# Altium PCB PCB1.PcbDoc (part 1 of 3)
Units mm, origin at the board's own origin, x right, y up, seen from the top; angles counter-clockwise.
Board outline 40 x 42 mm, 4 copper layers (Top Layer, GND, VCC, Bottom Layer), stack 4.941 mm thick; 42 components, 33 nets, 156 pads, 53 vias.
Unrouted connection lines stored in the file: 1.
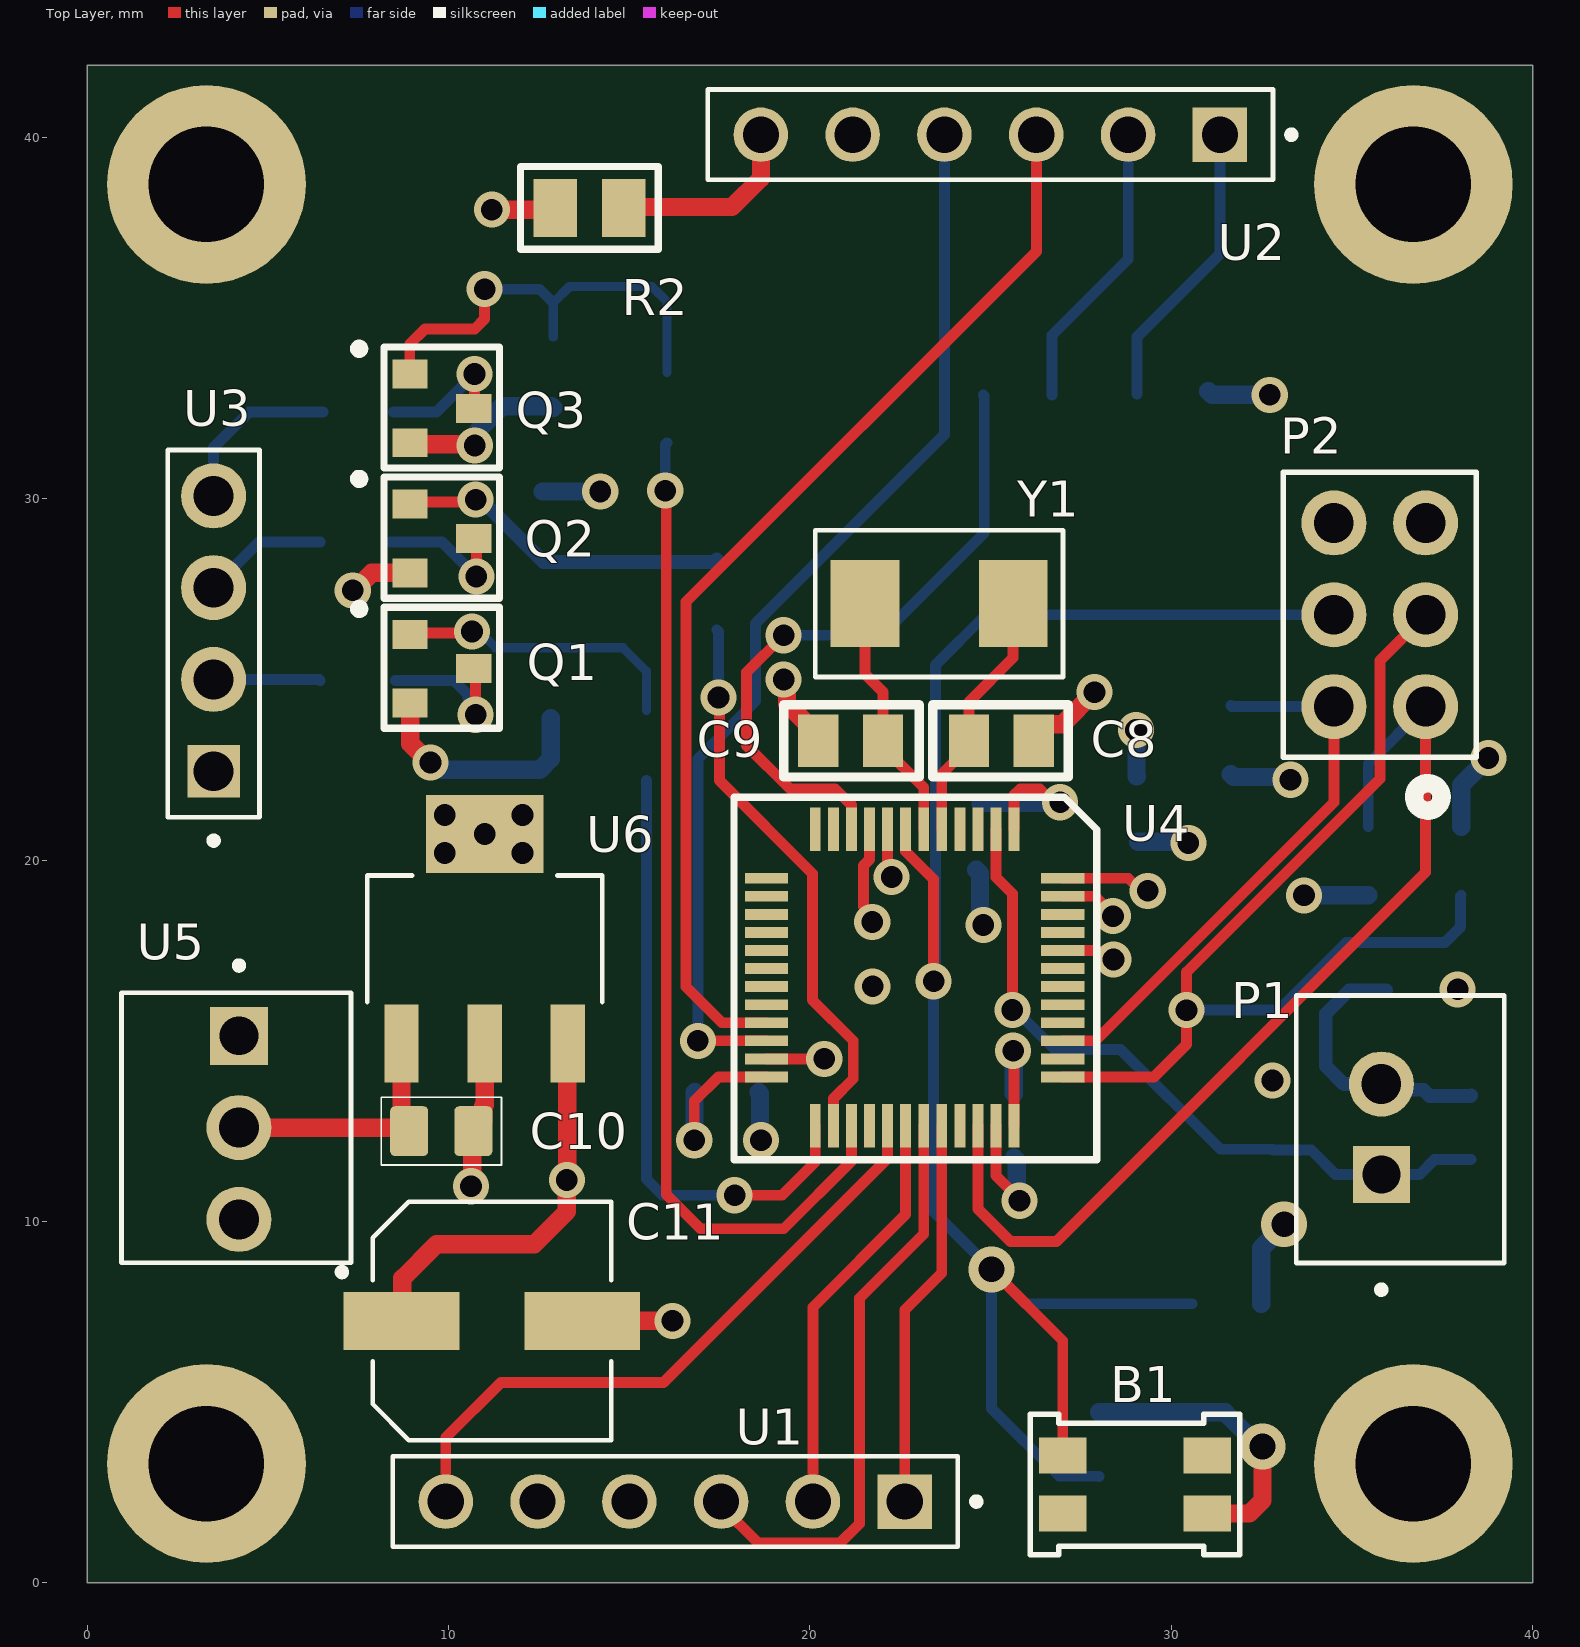
[diagram p0: Top Layer view]
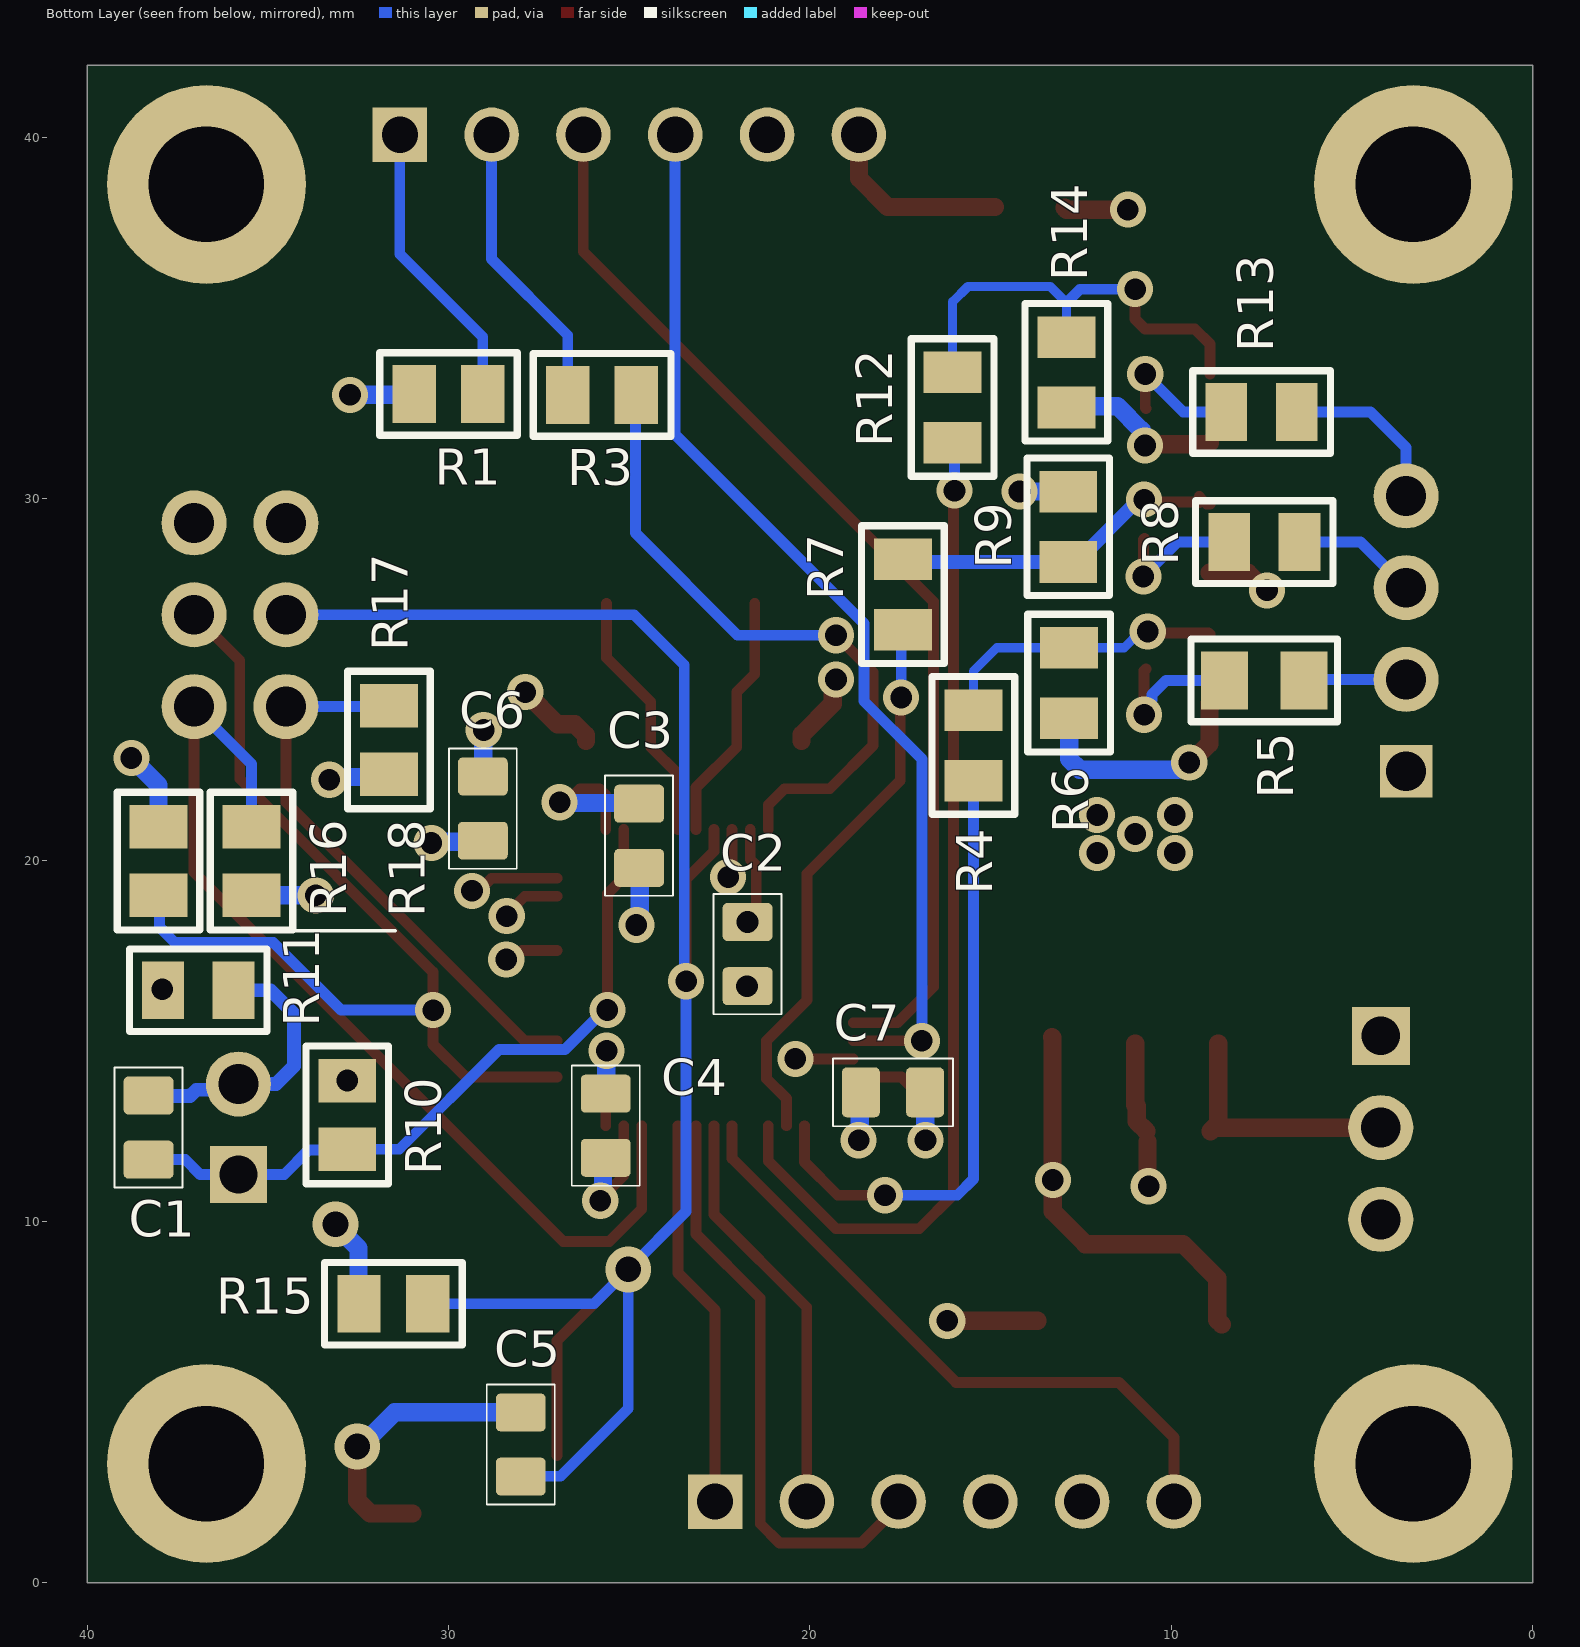
[diagram p1: Bottom Layer view, seen from below]
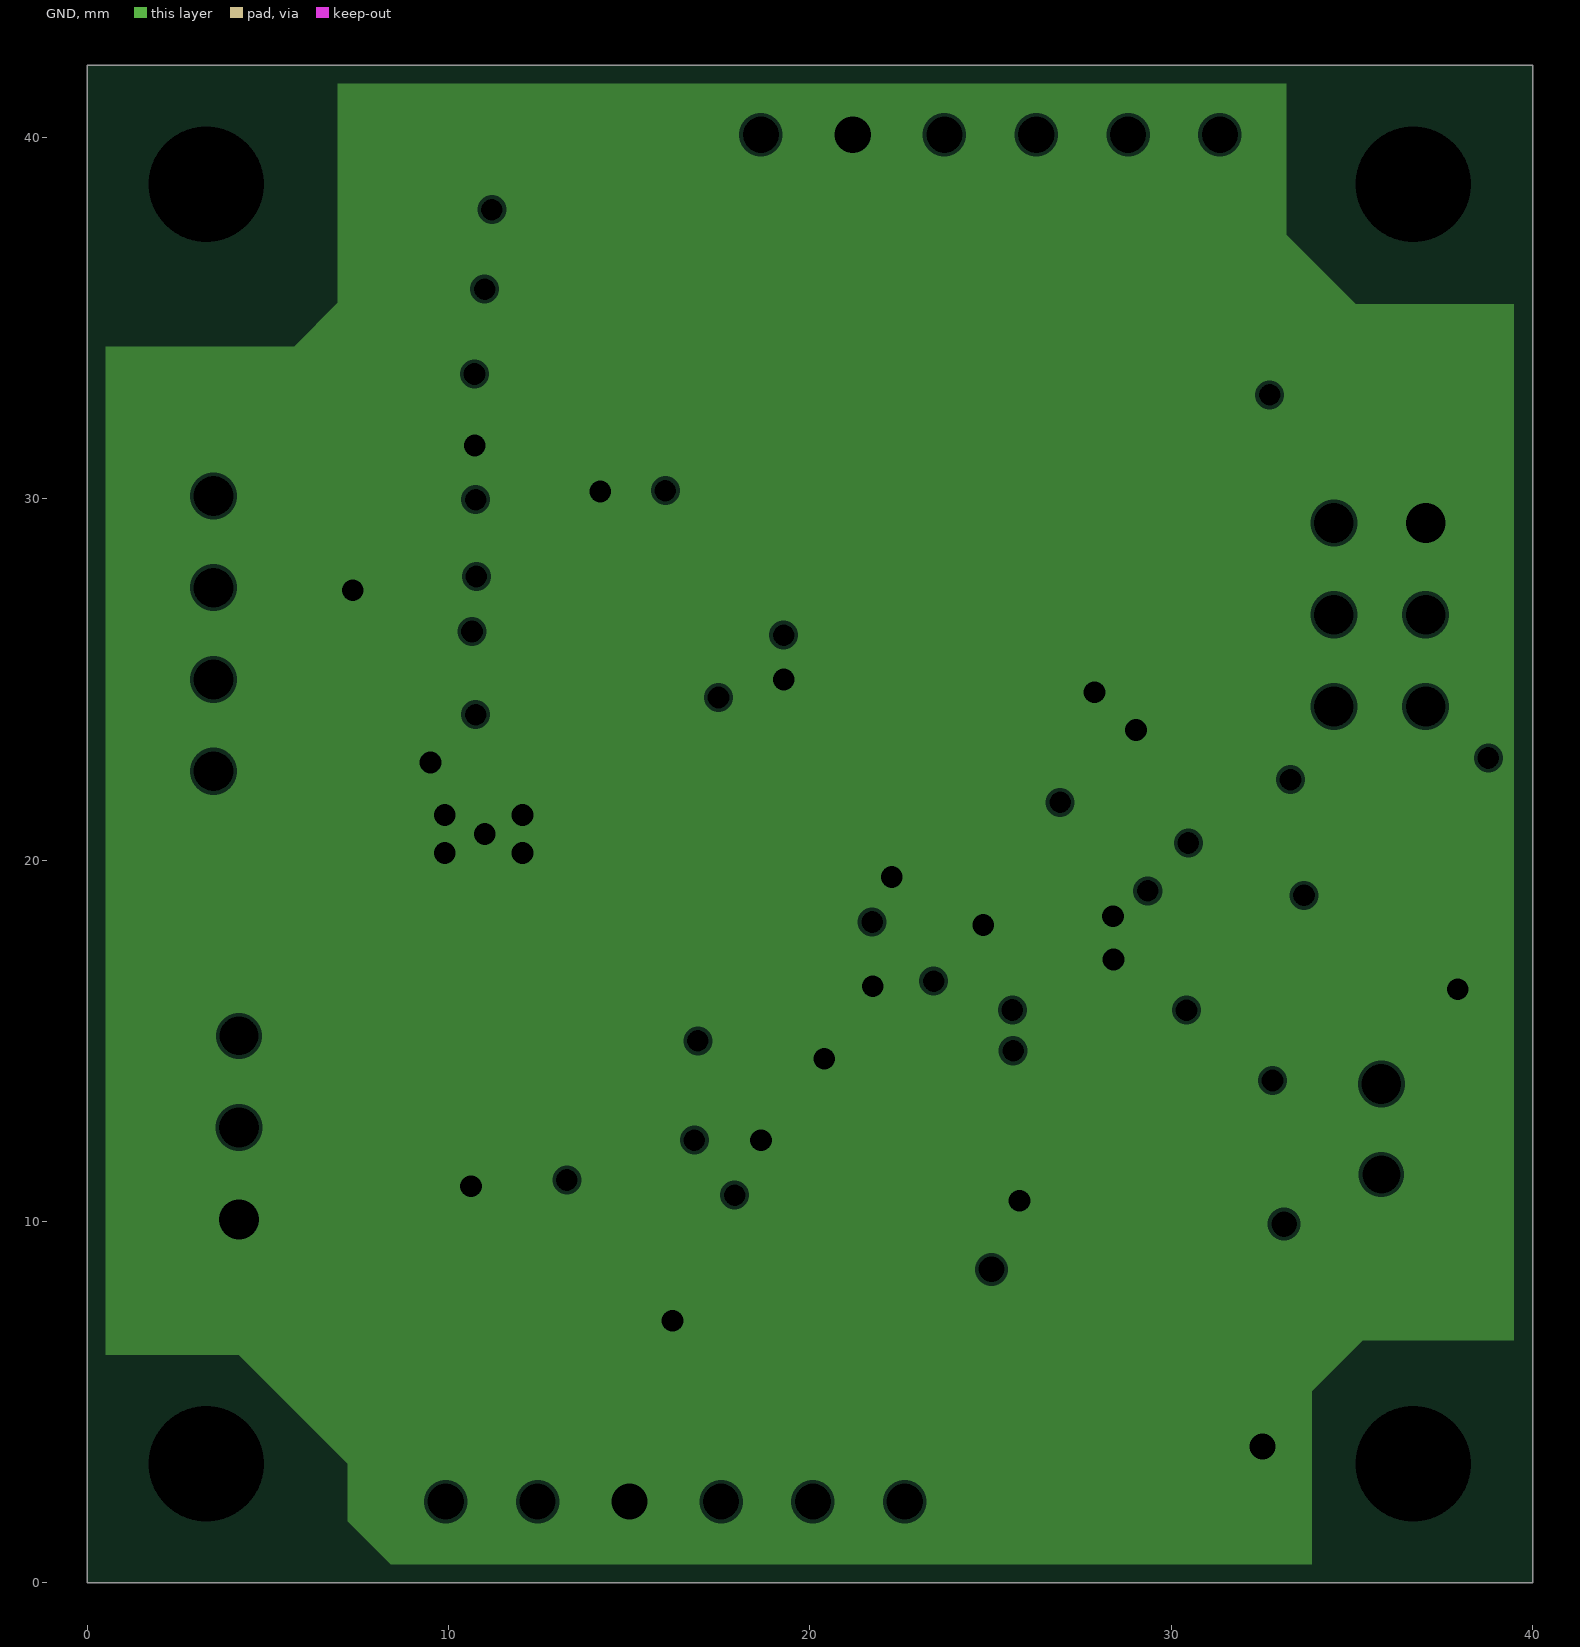
[diagram p2: GND, clearances drawn from the general rule]
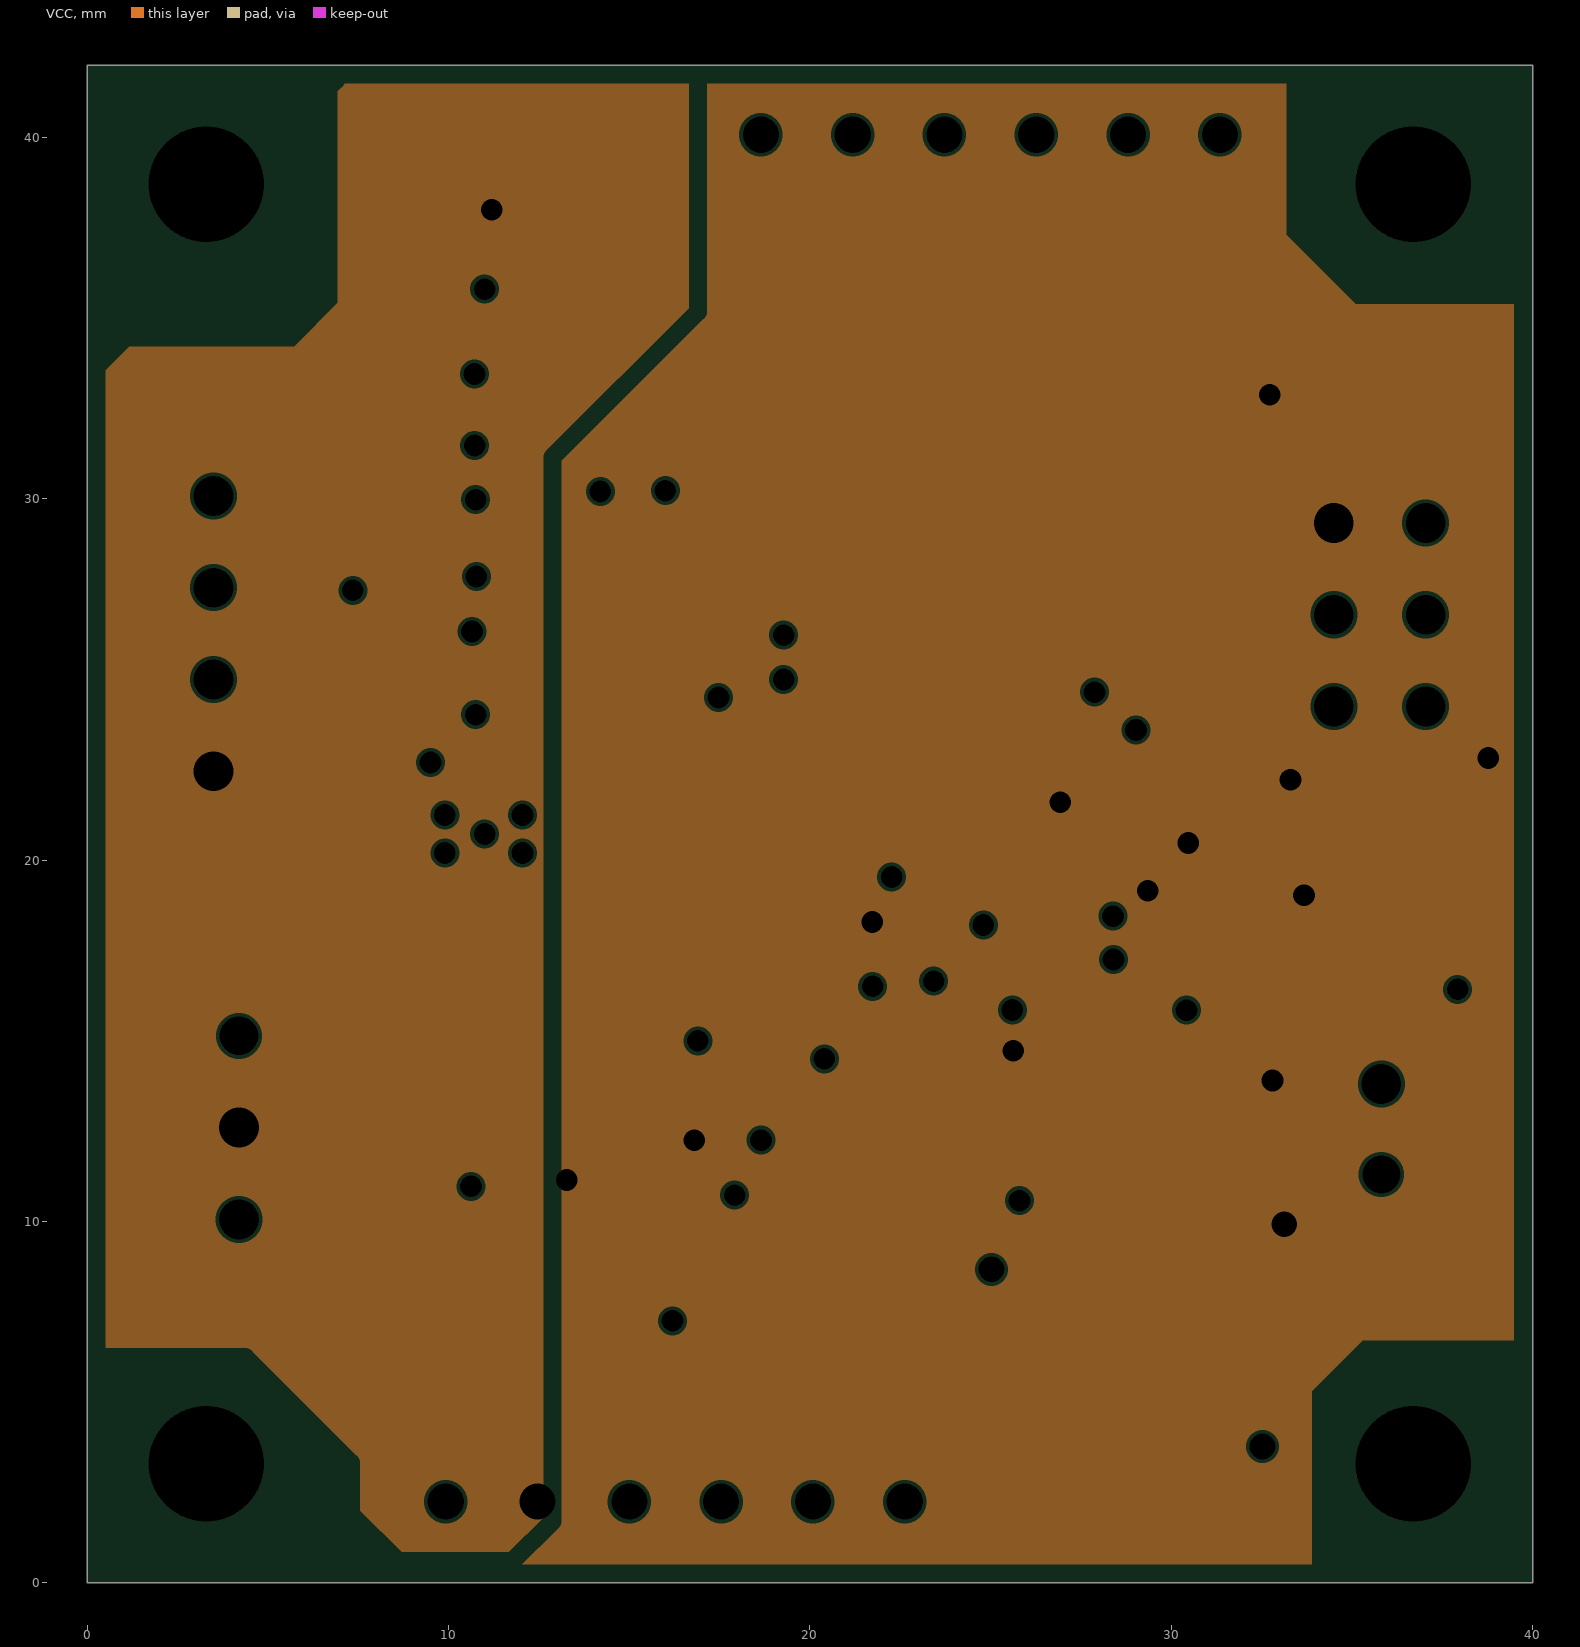
[diagram p3: VCC, clearances drawn from the general rule]
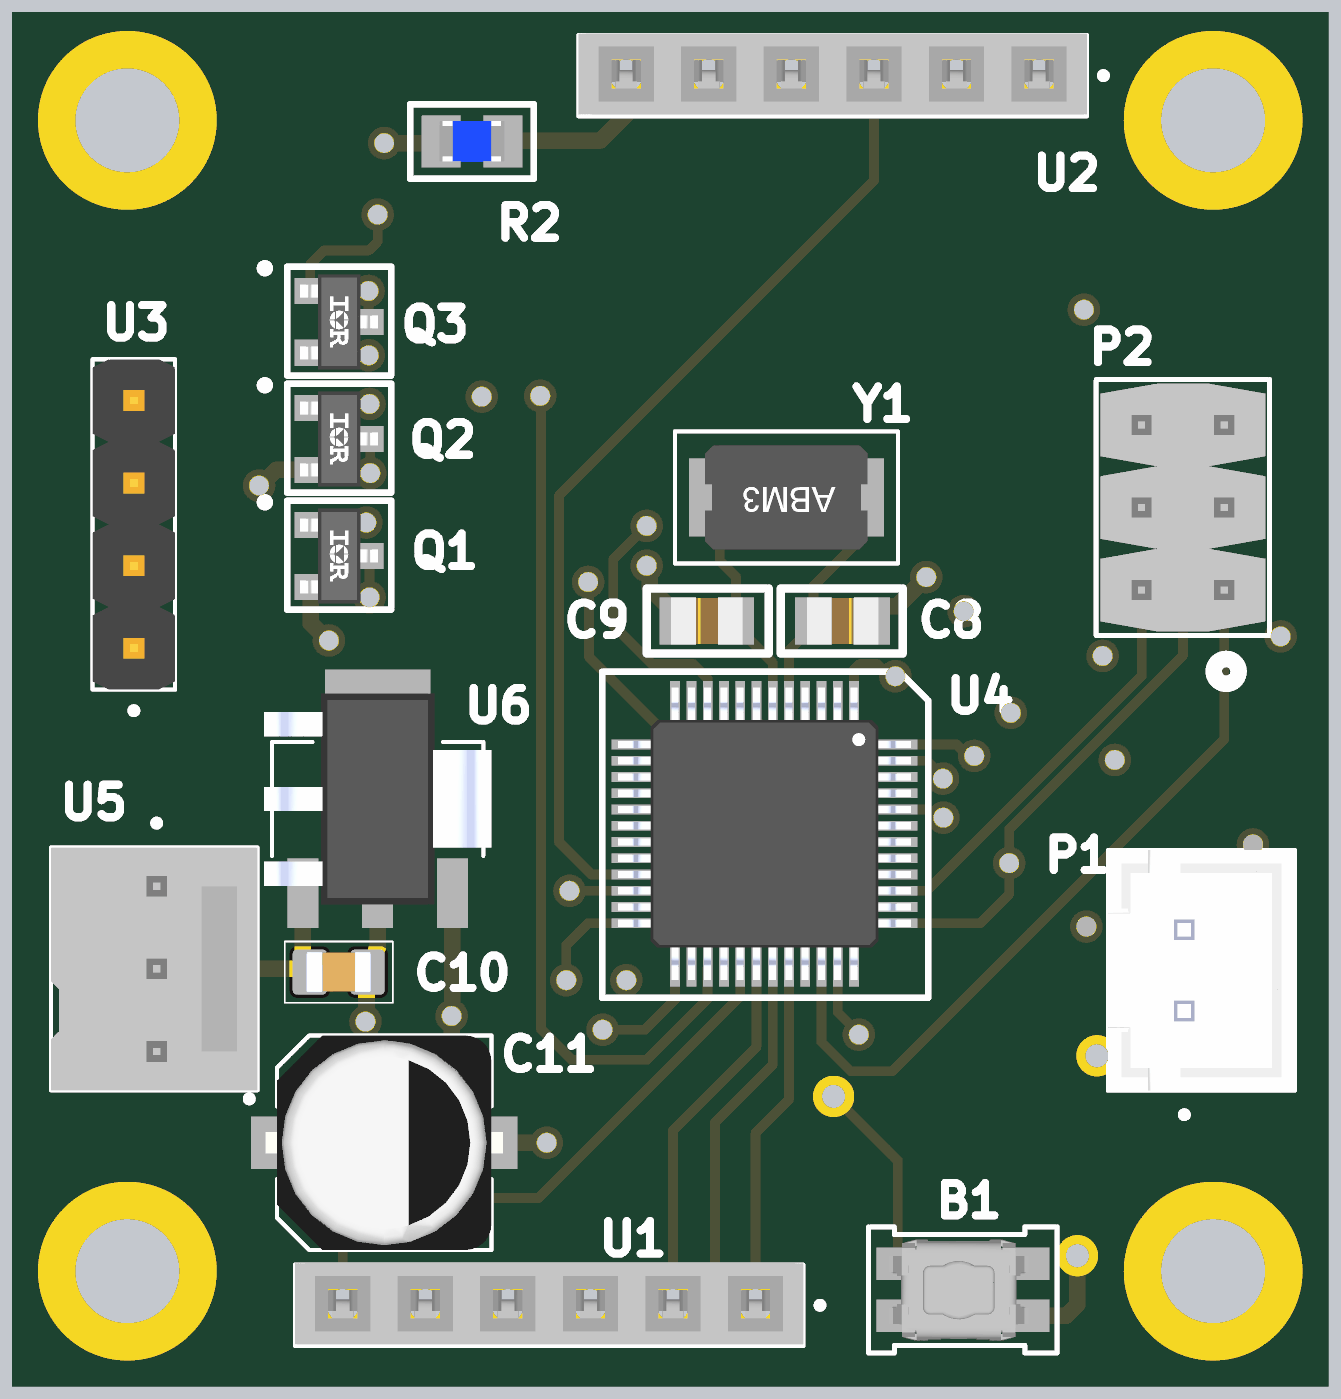
[diagram p4: 3D render of the assembled board from above, using the file's embedded part models]
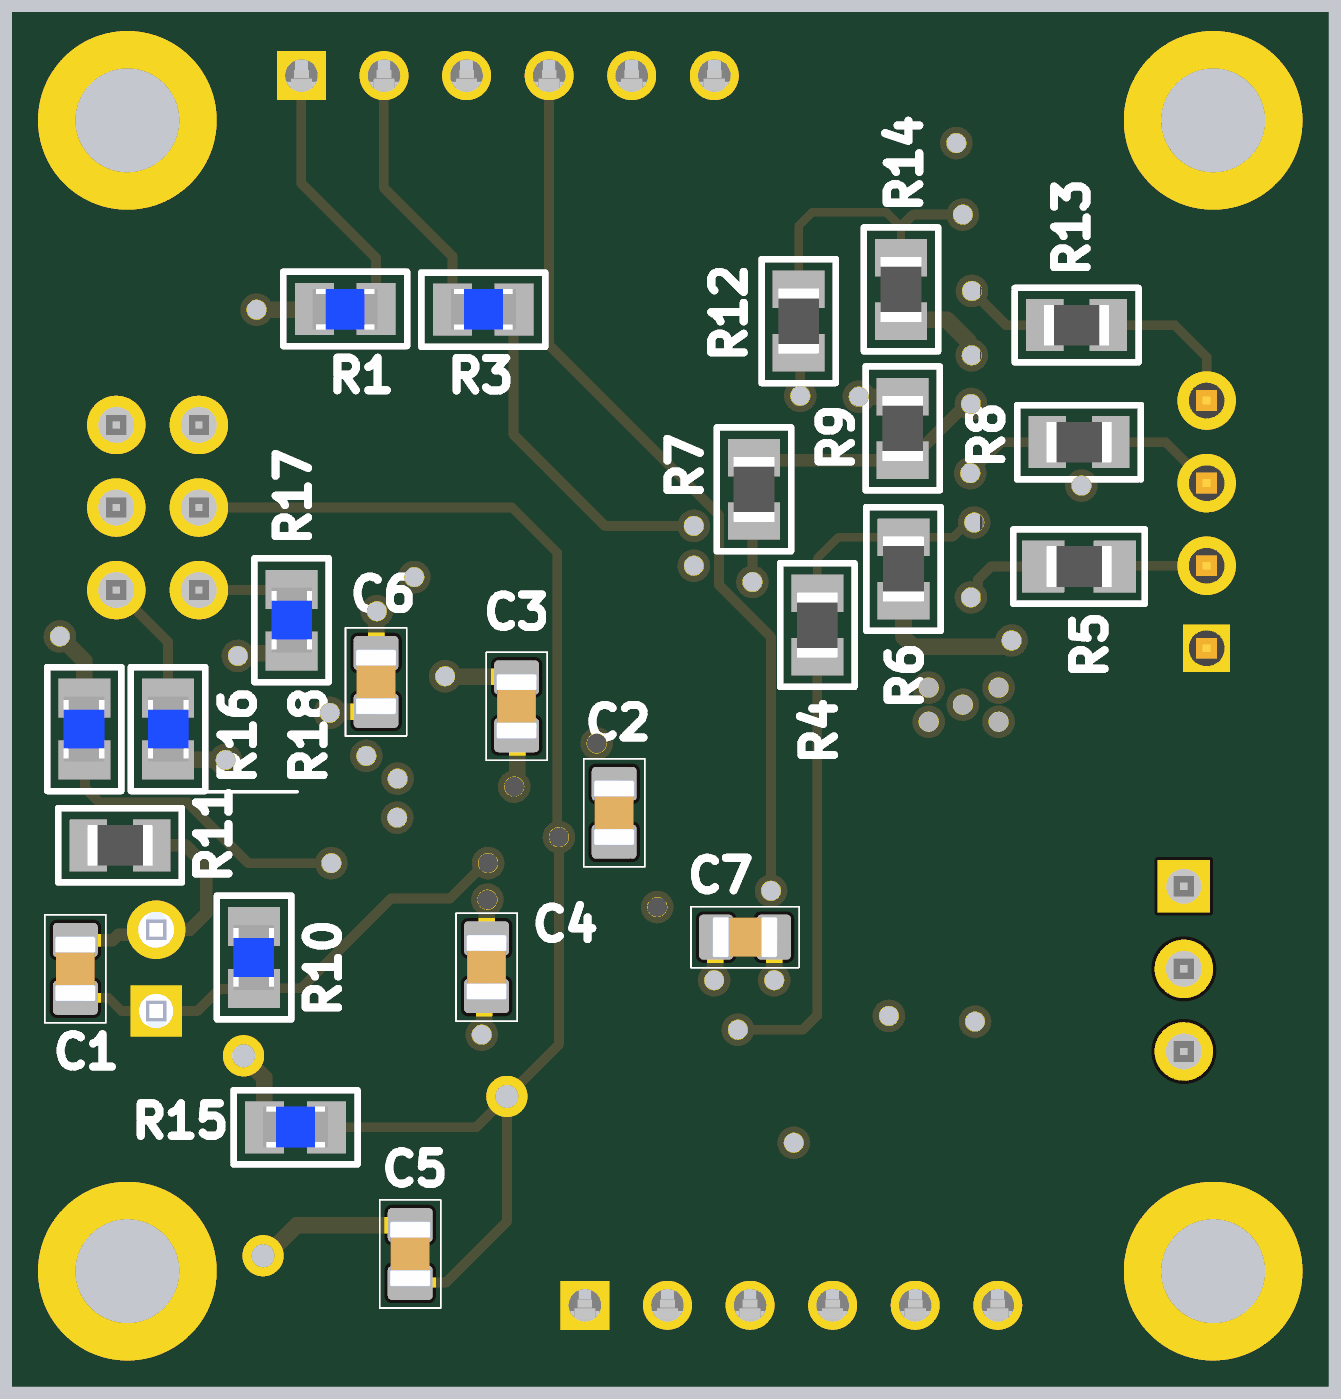
[diagram p5: 3D render of the assembled board from below, using the file's embedded part models]

## Layer stack, top to bottom
Top Solder: solder mask 0.0102, Solder Resist, Dk 3.5
Top Layer: signal copper 0.0356
Dielectric 2: prepreg 1.6, FR-4, Dk 4.8
GND: plane copper 0.035, net GND
Dielectric 1: dielectric 1.6, FR-4, Dk 4.8
VCC: plane copper 0.035, net (Multiple Nets)
Dielectric 3: prepreg 1.6, FR-4, Dk 4.8
Bottom Layer: signal copper 0.0356
Bottom Solder: solder mask 0.0102, Solder Resist, Dk 3.5

## Board outline
0,0 0,42 40,42 40,0

## Design rules (kind name [scope] priority, off if disabled: settings)
BoardOutlineClearance [All] p1: gap=0.2 ignorepadtopadclearanceinfootprint=FALSE
Clearance [All] p1: gap=0.102 ignorepadtopadclearanceinfootprint=TRUE except(0.127: Arc-Via Track-Via SMDPad-Via THPad-Via Via-Via Via-Fill Via-Poly Via-Region Via-Text; 0.254: Arc-Hole Track-Hole SMDPad-Hole THPad-Hole Via-Hole Fill-Hole Poly-Hole Region-Hole Text-Hole)
ComponentClearance [All] p1: gap=0.102 collisioncheckmode=3 verticalgap=0.102 showdistances=TRUE
DiffPairsRouting [All] p1: maxlimit=0.102 minlimit=0.102 mostfreqgap=0.102 toplayer_minwidth=0.102 toplayer_maxwidth=1816.048 toplayer_prefwidth=0.102 bottomlayer_minwidth=0.102 bottomlayer_maxwidth=1816.048 bottomlayer_prefwidth=0.102 maxuncoupledlength=12.7
Height [All] p1: minheight=0 maxheight=1816.048 prefheight=12.7
HoleSize [All] p1: absolutevalues=TRUE maxlimit=6.3 minlimit=0.2 maxpercent=80.000 minpercent=20.000
HoleToHoleClearance [All] p1: gap=0.254 allowstackedmicrovias=FALSE
MinimumAnnularRing [All] p1: minimumring=0.152
MinimumSolderMaskSliver [All] p1: minsoldermaskwidth=0.152
PlaneClearance [All] p1: clearance=0.102
PlaneConnect PlaneConnectPowerPads [InPadClass('PowerPads')] p1: planeconnectstyle=Direct reliefexpansion=0.508 reliefentries=4 reliefconductorwidth=0.254 reliefairgap=0.254
PlaneConnect [All] p2: pad.planeconnectstyle=Relief pad.reliefexpansion=0.3 pad.reliefentries=4 pad.reliefconductorwidth=0.102 pad.reliefairgap=0.102 via.planeconnectstyle=Direct via.reliefexpansion=0.3 via.reliefentries=4 via.reliefconductorwidth=0.127 via.reliefairgap=0.127
PolygonConnect PolygonConnectPowerPads [All vs (InPadClass('PowerPads'))] p1: connectstyle=Direct reliefconductorwidth=0.254 reliefentries=4 polygonreliefangle="90 Angle" airgapwidth=0.254
PolygonConnect [All] p2: thpad.connectstyle=Relief thpad.reliefconductorwidth=0.102 thpad.reliefentries=4 thpad.polygonreliefangle="90 Angle" thpad.airgapwidth=0.102 smdpad.connectstyle=Relief smdpad.reliefconductorwidth=0.102 smdpad.reliefentries=4 smdpad.polygonreliefangle="90 Angle" smdpad.airgapwidth=0.102 via.connectstyle=Direct via.reliefconductorwidth=0.127 via.reliefentries=4 via.polygonreliefangle="90 Angle" via.airgapwidth=0.127
RoutingVias [All] p1: holewidth=0.2 width=0.45 viastyle="Through Hole" minholewidth=0.2 minwidth=0.45 maxholewidth=6.3 maxwidth=6.55
SilkToSilkClearance [All] p1: silktosilkclearance=0.127
SilkToSolderMaskClearance [IsPad] p1: minsilkscreentomaskgap=0.127 clearancetoexposedcopper=TRUE
SolderMaskExpansion [All] p1: expansion=0 istentingtop=FALSE
SupplyNets "Schematic Supply Nets_21" [InNet('STATE')] p1: voltage=0.000
SupplyNets "Schematic Supply Nets_20" [InNet('EN')] p2: voltage=0.000
SupplyNets "Schematic Supply Nets_19" [InNet('DTR')] p3: voltage=0.000
SupplyNets "Schematic Supply Nets_18" [InNet('BOT')] p4: voltage=0.000
SupplyNets "Schematic Supply Nets_17" [InNet('SWDIO')] p5: voltage=0.000
SupplyNets "Schematic Supply Nets_16" [InNet('OSCIN')] p6: voltage=0.000
SupplyNets "Schematic Supply Nets_15" [InNet('NSRT')] p7: voltage=0.000
SupplyNets "Schematic Supply Nets_14" [InNet('GREEN')] p8: voltage=0.000
SupplyNets "Schematic Supply Nets_13" [InNet('VCC5V')] p9: voltage=0.000
SupplyNets "Schematic Supply Nets_11" [InNet('RED')] p10: voltage=0.000
SupplyNets "Schematic Supply Nets_9" [InNet('BLUE')] p11: voltage=0.000
SupplyNets "Schematic Supply Nets_8" [InNet('RX')] p12: voltage=0.000
SupplyNets "Schematic Supply Nets_7" [InNet('SWO')] p13: voltage=0.000
SupplyNets "Schematic Supply Nets_6" [InNet('TX3')] p14: voltage=0.000
SupplyNets "Schematic Supply Nets_5" [InNet('RX3')] p15: voltage=0.000
SupplyNets "Schematic Supply Nets_4" [InNet('VCC3V3')] p16: voltage=0.000
SupplyNets "Schematic Supply Nets_3" [InNet('GND')] p17: voltage=0.000
SupplyNets "Schematic Supply Nets_2" [InNet('TX')] p18: voltage=0.000
SupplyNets "Schematic Supply Nets_1" [InNet('OSCOUT')] p19: voltage=0.000
SupplyNets "Schematic Supply Nets" [InNet('SWCLK')] p20: voltage=0.000
UnRoutedNet [All] p1: checkbadconnections=TRUE
Width Width_6mil [All] p1: maxlimit=25.4 minlimit=0.152 preferedwidth=0.152 minimp=50.000000 maximp=50.000000 favimp=50.000000
Width Width_4mil [All] p2: maxlimit=25.4 minlimit=0.102 preferedwidth=0.254 minimp=50.000000 maximp=50.000000 favimp=50.000000
19 further rules are at their usual default settings.

## Classes and differential pairs
component class POWER: C10 C11 U5 U6
component class Micro: B1 C2 C3 C4 C5 C6 C7 C8 C9 P2 R15 R16 R17 R18 U4 Y1
component class LOGICA: C1 P1 Q1 Q2 Q3 R4 R5 R6 R7 R8 R9 R10 R11 R12 R13 R14 U3
component class BLUETOOH: R1 R2 R3 U1 U2

## Components (designator, comment, footprint, x,y, rotation, side; value= is the part's Value field where it differs from the comment)
B1 "EVP-AA202K" BOTãO 28.9,2.722 r0 top
C1 "100nF" 0805_SAMSUNG 38.3,12.6 r90 bottom
C2 "100nF" 0805_SAMSUNG 21.725,17.4 r90 bottom
C3 "100nF" 0805_SAMSUNG 24.725,20.675 r90 bottom
C4 "100nF" 0805_SAMSUNG 25.65,12.65 r90 bottom
C5 "100nF" 0805_SAMSUNG 28,3.829 r90 bottom
C6 "100nF" 0805_SAMSUNG 29.05,21.425 r90 bottom
C7 "100nF" 0805_SAMSUNG 17.7,13.575 r0 bottom
C8 "22p" 22P 25.3,23.3 r180 top value=22pF
C9 "22p" 22P 21.128,23.3 r0 top value=22pF
C10 "1uF" 0805_SAMSUNG 9.8,12.5 r0 top value=1µF
C11 "47uF" 47UF 11.2,7.25 r0 top value=47µF
P1 "B2B-XH-A-GU" CONECTOR2.54MM 36.339,12.553 r270 top
P2 "STlink" CONECTOR6PINOS2LINHAS 37.04,24.25 r90 top
Q1 "IRLML2502TRPBF" MOSFET 9.815,25.3 r0 top value=45mΩ
Q2 "IRLML2502TRPBF" MOSFET 9.815,28.9 r0 top value=45mΩ
Q3 "IRLML2502TRPBF" MOSFET 9.815,32.5 r0 top value=45mΩ
R1 "0R" 0R 30,32.9 r180 bottom value=0Ω
R2 "0R" 0R 13.9,38.05 r180 top value=0Ω
R3 "0R" 0R 25.75,32.875 r0 bottom value=0Ω
R4 "100" 100RESISTOR 15.475,23.175 r90 bottom value=100Ω
R5 "270" 270RESISTOR 7.425,24.975 r180 bottom value=270Ω
R6 "100k" 100KRESISTOR 12.825,24.9 r90 bottom value=100kΩ
R7 "100" 100RESISTOR 17.425,27.35 r90 bottom value=100Ω
R8 "180" 180RESISTOR 7.425,28.8 r180 bottom value=180Ω
R9 "100k" 100KRESISTOR 12.85,29.225 r270 bottom value=100kΩ
R10 "10k" 10KRESISTOR 32.8,12.95 r270 bottom value=10kΩ
R11 "100" 100RESISTOR 36.925,16.4 r0 bottom value=100Ω
R12 "100" 100RESISTOR 16.05,32.525 r90 bottom value=100Ω
R13 "180" 180RESISTOR 7.5,32.4 r180 bottom value=180Ω
R14 "100k" 100KRESISTOR 12.9,33.5 r90 bottom value=100kΩ
R15 "10k" 10KRESISTOR 31.525,7.725 r0 bottom value=10kΩ
R16 "10k" 10KRESISTOR 38.025,19.975 r270 bottom value=10kΩ
R17 "10k" 10KRESISTOR 31.65,23.325 r90 bottom value=10kΩ
R18 "10k" 10KRESISTOR 35.45,19.975 r90 bottom value=10kΩ
U1 "M20-7820646" 6PINFEMEA 16.275,2.25 r180 top
U2 "M20-7820646" 6PINFEMEA 24.995,40.075 r180 top
U3 "61300411121" CONECTOR4PINOS 3.5,26.27 r90 top
U4 "STM32F103C8T6" STM32F103C8T6 25.65,20.85 r270 top
U5 "22-23-2031" CONECTOR3PINOS 4.202,12.598 r270 top
U6 "LM3940IMPX-3.3/NOPB" regulador 11,17.825 r90 top
Y1 "8MHz" CRISTAL 23.575,27.1 r180 top

## Footprints (in the part's own frame and the unit in brackets; to place one, negate y for a bottom-side part, rotate by r counter-clockwise, add the part's x,y. Pads: shape width x height; smd on the part's side, far side on the other; paste and mask are expansions set on the pad)
0R [mm]
  rect 1.2x1.6 smd: 1(-0.95,0) 2(0.95,0)
  silkscreen extent -1.91,-1.14 1.91,1.14, body extent -1,-0.64 1,0.62, height 0.46
6PINFEMEA [mm]
  rect 1.508x1.508 / inner round 1.508 / far side rect 1.508x1.508 hole 1: 1(-6.35,0)
  round 1.508 hole 1: 2(-3.81,0) 3(-1.27,0) 4(1.27,0) 5(3.81,0) 6(6.35,0)
  silkscreen extent -8.43,-1.25 7.82,1.25, body extent -7.82,-1.3 7.82,1.2, height 8.51
10KRESISTOR [mm]
  rect 1.2x1.6 smd: 1(-0.95,0) 2(0.95,0)
  silkscreen extent -1.91,-1.14 1.91,1.14, body extent -1,-0.64 1,0.62, height 0.46
22P [mil]
  rect 44x57 smd paste+0 mask+0: 1(-35.31,0) 2(35.31,0)
  silkscreen extent -73,-39 75,39, body extent -43,-29 43,29, height 57
47UF [mm]
  rect 3.2x1.6 smd: 1(-2.5,0) 2(2.5,0)
  silkscreen extent -4.25,-3.3 3.3,3.3, body extent -3.65,-3.3 3.65,3.3, height 5.8
100KRESISTOR [mm]
  rect 1.15x1.6 smd: 1(-0.975,0) 2(0.975,0)
  silkscreen extent -1.91,-1.14 1.91,1.14, body extent -1,-0.63 1,0.63, height 0.51
100RESISTOR [mm]
  rect 1.15x1.6 smd: 1(-0.975,0) 2(0.975,0)
  silkscreen extent -1.91,-1.14 1.91,1.14, body extent -1,-0.63 1,0.63, height 0.51
180RESISTOR [mm]
  rect 1.15x1.6 smd: 1(-0.975,0) 2(0.975,0)
  silkscreen extent -1.91,-1.14 1.91,1.14, body extent -1,-0.63 1,0.63, height 0.51
270RESISTOR [mm]
  rect 1.3x1.6 smd: 1(-1.1,0) 2(1.1,0)
  silkscreen extent -2.02,-1.14 2.03,1.14, body extent -1,-0.63 1,0.63, height 0.51
0805_SAMSUNG [mm]
  rrect25% 1.05x1.38 smd paste+0 mask+0.102: 1(-0.888,0) 2(0.888,0)
  silkscreen extent -1.66,-0.94 1.66,0.94, body extent -1,-0.63 1,0.63, height 0.95
BOTãO [mm]
  rect 1.321x1 smd paste+0 mask+0: 1(-1.9,0.803) 2(-1.9,-0.8) 3(2.1,-0.8) 4(2.1,0.803)
  silkscreen extent -2.8,-1.94 3,1.94, body extent -2.17,-1.56 2.12,1.55, height 1.71
CONECTOR2.54MM [mm]
  rect 1.575x1.575 / inner round 1.575 / far side rect 1.575x1.575 hole 1.05: 1(1.25,-0.525)
  round 1.8 hole 1.1: 2(-1.25,-0.525)
  silkscreen extent -3.7,-2.88 4.54,2.88, body extent -3.7,-2.88 3.7,2.88, height 7.01
CONECTOR3PINOS [mm]
  rect 1.605x1.605 / inner round 1.605 / far side rect 1.605x1.605 hole 1.07 mask+0.102: 1(-2.54,0)
  round 1.8 hole 1.1 mask+0.102: 2(0,0) 3(2.54,0)
  silkscreen extent -4.58,-3.25 3.73,3.1, body extent -3.73,-3.25 3.73,3.1, height 10.68
CONECTOR4PINOS [mm]
  rect 1.45x1.45 hole 1.1: 1(-3.81,0)
  round 1.8 hole 1.1: 2(-1.27,0) 3(1.27,0) 4(3.81,0)
  silkscreen extent -5.83,-1.27 5.08,1.27, body extent -5.08,-1.27 5.08,1.27, height 7.27
CONECTOR6PINOS2LINHAS [mm]
  round 1.8 hole 1.1 paste-2539.97 mask+0: 1(0,0) 2(0,2.54) 3(2.54,0) 4(2.54,2.54) 5(5.08,0) 6(5.08,2.54)
  silkscreen extent -2.88,-1.4 6.48,3.94, body extent -1.27,-1.27 6.35,3.81, height 9.26
CRISTAL [mm]
  rect 1.9x2.4 smd: 1(-2.05,0) 2(2.05,0)
  silkscreen extent -3.43,-2.03 3.43,2.03, body extent -2.5,-1.6 2.5,1.6, height 1.3
MOSFET [mm]
  rect 0.972x0.802 smd paste+0 mask+0: 1(-0.885,0.95) 2(-0.885,-0.95) 3(0.885,0)
  silkscreen extent -2.41,-1.65 1.6,1.78, body extent -1.2,-1.46 1.2,1.46, height 1.12
regulador [mm]
  rect 2.15x0.95 smd: 1(-2.9,2.3) 2(-2.9,0) 3(-2.9,-2.3)
  rect 2.15x3.25 smd: 4(2.9,0)
  silkscreen extent -1.75,-3.25 1.75,3.25, body extent -3.5,-3.25 3.5,3.25, height 1.8
STM32F103C8T6 [mm]
  rect 1.2x0.3 smd mask+0: 1(0,0) 2(0,-0.5) 3(0,-1) 4(0,-1.5) 5(0,-2) 6(0,-2.5) 7(0,-3) 8(0,-3.5) 9(0,-4) 10(0,-4.5) 11(0,-5) 12(0,-5.5) 25(8.2,-5.5) 26(8.2,-5) 27(8.2,-4.5) 28(8.2,-4) 29(8.2,-3.5) 30(8.2,-3) 31(8.2,-2.5) 32(8.2,-2) 33(8.2,-1.5) 34(8.2,-1) 35(8.2,-0.5) 36(8.2,0)
  rect 0.3x1.2 smd mask+0: 13(1.35,-6.85) 14(1.85,-6.85) 15(2.35,-6.85) 16(2.85,-6.85) 17(3.35,-6.85) 18(3.85,-6.85) 19(4.35,-6.85) 20(4.85,-6.85) 21(5.35,-6.85) 22(5.85,-6.85) 23(6.35,-6.85) 24(6.85,-6.85) 37(6.85,1.35) 38(6.35,1.35) 39(5.85,1.35) 40(5.35,1.35) 41(4.85,1.35) 42(4.35,1.35) 43(3.85,1.35) 44(3.35,1.35) 45(2.85,1.35) 46(2.35,1.35) 47(1.85,1.35) 48(1.35,1.35)
  silkscreen extent -0.89,-7.75 9.14,2.29, body extent -0.4,-7.25 8.6,1.75, height 1.6

## Part data
B1: "Switch Tactile N.O. SPST Rectangular Button J-Bend 0.02A 15VDC 1.6N SMD Embossed T/R", Case/Package=SMD/SMT, Color=Black, Contact Current Rating=20mA, Contact Resistance=100mΩ, Current Rating=50mA, Insulation Resistance=100MΩ, LCSC=C79147, Manufacturer=Panasonic, Max Operating Temperature=85°C, Max Voltage Rating (DC)=15V, Min Operating Temperature=-40°C, Operating Force=1.6N, Supplier Part Number=P13348SCT-ND, Actuator Length=300µm, Category="Tactile Switches", ComponentLink1Description=https://datasheet.octopart.com:443/EVP-AA202K-Panasonic-datasheet-156880147.pdf?src-supplier=Newark, ComponentLink1URL=https://datasheet.octopart.com:443/EVP-AA202K-Panasonic-datasheet-156880147.pdf?src-supplier=Newark, ComponentLink2Description=https://datasheet.octopart.com:443/EVP-AA202K-Panasonic-datasheet-78834739.pdf?src-supplier=Newark, ComponentLink2URL=https://datasheet.octopart.com:443/EVP-AA202K-Panasonic-datasheet-78834739.pdf?src-supplier=Newark, ComponentLink3Description=https://datasheet.octopart.com:443/EVP-AA202K-Panasonic-datasheet-13050113.pdf?src-supplier=Upverter, ComponentLink3URL=https://datasheet.octopart.com:443/EVP-AA202K-Panasonic-datasheet-13050113.pdf?src-supplier=Upverter, ComponentLink4Description=https://datasheet.octopart.com:443/EVP-AA202K-Panasonic-datasheet-138897654.pdf?src-supplier=Master+Electronics, ComponentLink4URL=https://datasheet.octopart.com:443/EVP-AA202K-Panasonic-datasheet-138897654.pdf?src-supplier=Master+Electronics, ComponentLink5Description=https://datasheet.octopart.com:443/EVPAA202K-Panasonic-datasheet-130260647.pdf?src-supplier=TME, ComponentLink5URL=https://datasheet.octopart.com:443/EVPAA202K-Panasonic-datasheet-130260647.pdf?src-supplier=TME, ComponentLink6Description=https://datasheet.octopart.com:443/EVP-AA202K-Panasonic-datasheet-94103455.pdf?src-supplier=Future+Electronics, ComponentLink6URL=https://datasheet.octopart.com:443/EVP-AA202K-Panasonic-datasheet-94103455.pdf?src-supplier=Future+Electronics, ComponentLink7Description=https://datasheet.octopart.com:443/EVP-AA202K-Panasonic-datasheet-84052654.pdf?src-supplier=Future+Electronics, ComponentLink7URL=https://datasheet.octopart.com:443/EVP-AA202K-Panasonic-datasheet-84052654.pdf?src-supplier=Future+Electronics, ComponentLink8Description=https://datasheet.octopart.com:443/EVP-AA202K-Panasonic-datasheet-62282203.pdf?src-supplier=Electro+Sonic, ComponentLink8URL=https://datasheet.octopart.com:443/EVP-AA202K-Panasonic-datasheet-62282203.pdf?src-supplier=Electro+Sonic, ComponentLink9Description=https://datasheet.octopart.com:443/EVPAA202K-Panasonic-datasheet-10854221.pdf?src-supplier=Farnell, ComponentLink9URL=https://datasheet.octopart.com:443/EVPAA202K-Panasonic-datasheet-10854221.pdf?src-supplier=Farnell, ComponentLink10Description=https://datasheet.octopart.com:443/EVP-AA202K-Panasonic-datasheet-124616.pdf?src-supplier=DigiKey, ComponentLink10URL=https://datasheet.octopart.com:443/EVP-AA202K-Panasonic-datasheet-124616.pdf?src-supplier=DigiKey, Contact Plating="Gold, Silver", Depth=2.9mm, Electrical Life=200kcycles, Height=1.4mm, Illumination Type="Illuminated, Non-Illuminated", Lead Free="Lead Free", Length=4.3mm, Lifecycle Status=Production, Manufacturer Part Number=EVP-AA202K, Max Current Rating=20mA, Mechanical Life=200kcycles, Mounting Technology="Surface Mount", Number of Positions=1, Pricing="1=0,83, 10=0,709, 25=0,6596, 100=0,5885, 250=0,54516, 500=0,51492, 1000=0,48712, 2500=0,45429 (USD)", Radiation Hardening=No, REACH SVHC=Yes, RoHS=Compliant, Stock=45, Supplier=DigiKey, Switch Function=Off-Mom, Switch Travel=150µm, Termination=J-Bend, Throw Configuration=SPST, Voltage Rating (DC)=15V
C1 C2 C3 C4 C5 C6 C7: library part CL21B104KBCNNNC, "Ceramic Capacitor, Multilayer, Ceramic, 50V, 10% +Tol, 10% -Tol, X7R, +-15% TC, 100nF, Surface Mount, 0805 inch", Case Code (Imperial)=0805, Case Code (Metric)=2012, Dielectric=X7R, Dielectric Material=Ceramic, LCSC=C1711, Manufacturer="Samsung Electro-Mechanics", Max Operating Temperature=125°C, Min Operating Temperature=-55°C, Tolerance=10%, Voltage=50V, Capacitance=100nF, Case/Package=0805, Category="Ceramic Capacitors", China RoHS=Compliant, ComponentLink1Description=https://datasheet.octopart.com:443/CL21B104KBCNNNC-Samsung-Electro-Mechanics-datasheet-137745078.pdf?src-supplier=IHS, ComponentLink1URL=https://datasheet.octopart.com:443/CL21B104KBCNNNC-Samsung-Electro-Mechanics-datasheet-137745078.pdf?src-supplier=IHS, ComponentLink2Description=https://datasheet.octopart.com/CL21B104KBCNNNC-Samsung-Electro-Mechanics-datasheet-8324245.pdf, ComponentLink2URL=https://datasheet.octopart.com/CL21B104KBCNNNC-Samsung-Electro-Mechanics-datasheet-8324245.pdf, ComponentLink3Description=https://datasheet.octopart.com/CL21B104KBCNNNC-Samsung-Electro-Mechanics-datasheet-97040617.pdf, ComponentLink3URL=https://datasheet.octopart.com/CL21B104KBCNNNC-Samsung-Electro-Mechanics-datasheet-97040617.pdf, ComponentLink4Description=https://datasheet.octopart.com:443/CL21B104KBCNNNC-Samsung-Electro-Mechanics-datasheet-11548950.pdf?src-supplier=Future+Electronics, ComponentLink4URL=https://datasheet.octopart.com:443/CL21B104KBCNNNC-Samsung-Electro-Mechanics-datasheet-11548950.pdf?src-supplier=Future+Electronics, ComponentLink5Description=https://datasheet.octopart.com:443/CL21B104KBCNNNC-Samsung-Electro-Mechanics-datasheet-116891032.pdf?src-supplier=Future+Electronics, ComponentLink5URL=https://datasheet.octopart.com:443/CL21B104KBCNNNC-Samsung-Electro-Mechanics-datasheet-116891032.pdf?src-supplier=Future+Electronics, ComponentLink6Description=https://datasheet.octopart.com:443/CL21B104KBCNNNC-Samsung-Electro-Mechanics-datasheet-81462175.pdf?src-supplier=Future+Electronics, ComponentLink6URL=https://datasheet.octopart.com:443/CL21B104KBCNNNC-Samsung-Electro-Mechanics-datasheet-81462175.pdf?src-supplier=Future+Electronics, ComponentLink7Description=https://datasheet.octopart.com:443/CL21B104KBCNNNC-Samsung-datasheet-42485244.pdf?src-supplier=Future+Electronics, ComponentLink7URL=https://datasheet.octopart.com:443/CL21B104KBCNNNC-Samsung-datasheet-42485244.pdf?src-supplier=Future+Electronics, ComponentLink8Description=https://datasheet.octopart.com:443/CL21B104KBCNNNC-Samsung-Electro-Mechanics-datasheet-149045937.pdf?src-supplier=Future+Electronics, ComponentLink8URL=https://datasheet.octopart.com:443/CL21B104KBCNNNC-Samsung-Electro-Mechanics-datasheet-149045937.pdf?src-supplier=Future+Electronics, ComponentLink9Description=https://datasheet.octopart.com:443/CL21B104KBCNNNC-Samsung-datasheet-8326407.pdf?src-supplier=TME, ComponentLink9URL=https://datasheet.octopart.com:443/CL21B104KBCNNNC-Samsung-datasheet-8326407.pdf?src-supplier=TME, Contact Plating=Tin, Depth=1.25mm, Height=950µm, Lead Free="Lead Free", Length=2mm, Lifecycle Status=Production, Manufacturer Part Number=CL21B104KBCNNNC, Material=Ceramic, Mount="Surface Mount", Number of Terminals=2, Pricing 1="4000=0,0047, 8000=0,00468, 16000=0,00466, 32000=0,00463, 64000=0,00461 (USD)", Radiation Hardening=No, REACH SVHC=Yes, RoHS=Compliant, Schedule B="8532240020, 8532240020|8532240020, 8532240020|8532240020|8532240020, 8532240020|8532240020|8532240020|8532240020", Stock 1=2653700, Supplier 1=Avnet, Supplier Part Number 1=CL21B104KBCNNNC, Thickness=939.8µm, Voltage Rating=50V, Voltage Rating (DC)=50V, Width=1.25mm
C8 C9: library part CC0805FRNPO9BN220, "0805 22 pF 50 V ±1 % Tolerance NP0 SMT Multilayer Ceramic Capacitor", Case/Package=0805, Dielectric=C0G, Dielectric Material=Ceramic, Manufacturer="Yageo Group", Max Operating Temperature=125°C, Min Operating Temperature=-55°C, Tolerance=1%, Voltage Rating=50V, Category="Ceramic Capacitors", China RoHS=Compliant, ComponentLink1Description=https://datasheet.octopart.com:443/CC0805FRNPO9BN220-Yageo-datasheet-182140217.pdf?src-supplier=IHS, ComponentLink1URL=https://datasheet.octopart.com:443/CC0805FRNPO9BN220-Yageo-datasheet-182140217.pdf?src-supplier=IHS, ComponentLink2Description=https://datasheet.octopart.com:443/CC0805FRNPO9BN220-Yageo-datasheet-151948684.pdf?src-supplier=element14+APAC, ComponentLink2URL=https://datasheet.octopart.com:443/CC0805FRNPO9BN220-Yageo-datasheet-151948684.pdf?src-supplier=element14+APAC, ComponentLink3Description=https://datasheet.octopart.com:443/CC0805FRNPO9BN220-Yageo-datasheet-181969002.pdf?src-supplier=Farnell, ComponentLink3URL=https://datasheet.octopart.com:443/CC0805FRNPO9BN220-Yageo-datasheet-181969002.pdf?src-supplier=Farnell, ComponentLink4Description=https://datasheet.octopart.com:443/CC0805FRNPO9BN220-Yageo-datasheet-181969001.pdf?src-supplier=Farnell, ComponentLink4URL=https://datasheet.octopart.com:443/CC0805FRNPO9BN220-Yageo-datasheet-181969001.pdf?src-supplier=Farnell, ComponentLink5Description=https://datasheet.octopart.com:443/CC0805FRNPO9BN220-Yageo-datasheet-10406438.pdf?src-supplier=_legacy+Avnet, ComponentLink5URL=https://datasheet.octopart.com:443/CC0805FRNPO9BN220-Yageo-datasheet-10406438.pdf?src-supplier=_legacy+Avnet, ComponentLink6Description=https://datasheet.octopart.com:443/CC0805FRNPO9BN220-Yageo-datasheet-137875056.pdf?src-supplier=Future+Electronics, ComponentLink6URL=https://datasheet.octopart.com:443/CC0805FRNPO9BN220-Yageo-datasheet-137875056.pdf?src-supplier=Future+Electronics, ComponentLink7Description=https://datasheet.octopart.com:443/CC0805FRNPO9BN220-Yageo-datasheet-137700082.pdf?src-supplier=Future+Electronics, ComponentLink7URL=https://datasheet.octopart.com:443/CC0805FRNPO9BN220-Yageo-datasheet-137700082.pdf?src-supplier=Future+Electronics, ComponentLink8Description=https://datasheet.octopart.com:443/CC0805FRNPO9BN220-Yageo-datasheet-78855684.pdf?src-supplier=Future+Electronics, ComponentLink8URL=https://datasheet.octopart.com:443/CC0805FRNPO9BN220-Yageo-datasheet-78855684.pdf?src-supplier=Future+Electronics, ComponentLink9Description=https://datasheet.octopart.com:443/CC0805FRNPO9BN220-Yageo-datasheet-24578986.pdf?src-supplier=Future+Electronics, ComponentLink9URL=https://datasheet.octopart.com:443/CC0805FRNPO9BN220-Yageo-datasheet-24578986.pdf?src-supplier=Future+Electronics, ComponentLink10Description=https://datasheet.octopart.com:443/CC0805FRNPO9BN220-Yageo-datasheet-16730043.pdf?src-supplier=Future+Electronics, ComponentLink10URL=https://datasheet.octopart.com:443/CC0805FRNPO9BN220-Yageo-datasheet-16730043.pdf?src-supplier=Future+Electronics, ComponentLink11Description=https://datasheet.octopart.com:443/CC0805FRNPO9BN220-Yageo-datasheet-12589826.pdf?src-supplier=Future+Electronics, ComponentLink11URL=https://datasheet.octopart.com:443/CC0805FRNPO9BN220-Yageo-datasheet-12589826.pdf?src-supplier=Future+Electronics, ComponentLink12Description=http://sigma.octopart.com:80/conflict_mineral_statement/Yageo-company-3.pdf?src-supplier=Compliance+Statements, ComponentLink12URL=http://sigma.octopart.com:80/conflict_mineral_statement/Yageo-company-3.pdf?src-supplier=Compliance+Statements, ComponentLink13Description=http://sigma.octopart.com:80/rohs_statement/Yageo-company-2.pdf?src-supplier=Compliance+Statements, ComponentLink13URL=http://sigma.octopart.com:80/rohs_statement/Yageo-company-2.pdf?src-supplier=Compliance+Statements, Depth=1.25mm, Halogen Free="Halogen Free", Height=600µm, Lead Free="Lead Free", Length=2mm, Lifecycle Status=Production, Manufacturer Part Number=CC0805FRNPO9BN220, Mounting Technology="Surface Mount", Number of Terminals=2, Packaging="Tape and Reel", Pricing="10=0,099, 25=0,092, 50=0,085, 100=0,078, 250=0,074, 500=0,069, 1000=0,064 (USD)", Radiation Hardening=No, REACH SVHC=Yes, RoHS=Compliant, Schedule B="8532240020, 8532240020|8532240020|8532240020|8532240020|8532240020", Stock=6538, Supplier=Newark, Supplier Part Number=CC0805FRNPO9BN220, Thickness=711.2µm, Voltage Rating (DC)=50V, Width=1.25mm
C10: library part CL21B105KBFNNNE, "50V 1uF X7R ±10% 0805 Multilayer Ceramic Capacitors MLCC - SMD/SMT ROHS", Case Code (Imperial)=0805, Case Code (Metric)=2012, Dielectric=X7R, Dielectric Material=Ceramic, Manufacturer="Samsung Electro-Mechanics", Max Operating Temperature=125°C, Min Operating Temperature=-55°C, Tolerance=10%, Voltage=50V, Case/Package=0805, Category="Ceramic Capacitors", China RoHS=Compliant, ComponentLink1Description=https://datasheet.octopart.com:443/CL21B105KBFNNNE-Samsung-Electro-Mechanics-datasheet-136482495.pdf?src-supplier=IHS, ComponentLink1URL=https://datasheet.octopart.com:443/CL21B105KBFNNNE-Samsung-Electro-Mechanics-datasheet-136482495.pdf?src-supplier=IHS, ComponentLink2Description=https://datasheet.octopart.com:443/CL21B105KBFNNNE-Samsung-Electro-Mechanics-datasheet-11733377.pdf?src-supplier=Future+Electronics, ComponentLink2URL=https://datasheet.octopart.com:443/CL21B105KBFNNNE-Samsung-Electro-Mechanics-datasheet-11733377.pdf?src-supplier=Future+Electronics, ComponentLink3Description=https://datasheet.octopart.com:443/CL21B105KBFNNNE-Samsung-Electro-Mechanics-datasheet-116891038.pdf?src-supplier=Future+Electronics, ComponentLink3URL=https://datasheet.octopart.com:443/CL21B105KBFNNNE-Samsung-Electro-Mechanics-datasheet-116891038.pdf?src-supplier=Future+Electronics, ComponentLink4Description=https://datasheet.octopart.com:443/CL21B105KBFNNNE-Samsung-Electro-Mechanics-datasheet-81462183.pdf?src-supplier=Future+Electronics, ComponentLink4URL=https://datasheet.octopart.com:443/CL21B105KBFNNNE-Samsung-Electro-Mechanics-datasheet-81462183.pdf?src-supplier=Future+Electronics, ComponentLink5Description=https://datasheet.octopart.com:443/CL21B105KBFNNNE-Samsung-datasheet-48647582.pdf?src-supplier=Future+Electronics, ComponentLink5URL=https://datasheet.octopart.com:443/CL21B105KBFNNNE-Samsung-datasheet-48647582.pdf?src-supplier=Future+Electronics, ComponentLink6Description=https://datasheet.octopart.com:443/CL21B105KBFNNNE-Samsung-datasheet-8326294.pdf?src-supplier=Future+Electronics, ComponentLink6URL=https://datasheet.octopart.com:443/CL21B105KBFNNNE-Samsung-datasheet-8326294.pdf?src-supplier=Future+Electronics, ComponentLink7Description=https://datasheet.octopart.com:443/CL21B105KBFNNNE-Samsung-Electro-Mechanics-datasheet-149045959.pdf?src-supplier=Future+Electronics, ComponentLink7URL=https://datasheet.octopart.com:443/CL21B105KBFNNNE-Samsung-Electro-Mechanics-datasheet-149045959.pdf?src-supplier=Future+Electronics, ComponentLink8Description=https://datasheet.octopart.com/CL21B105KBFNNNE-Samsung-Electro-Mechanics-datasheet-97040617.pdf, ComponentLink8URL=https://datasheet.octopart.com/CL21B105KBFNNNE-Samsung-Electro-Mechanics-datasheet-97040617.pdf, ComponentLink9Description=https://datasheet.octopart.com/CL21B105KBFNNNE-Samsung-Electro-Mechanics-datasheet-8324245.pdf, ComponentLink9URL=https://datasheet.octopart.com/CL21B105KBFNNNE-Samsung-Electro-Mechanics-datasheet-8324245.pdf, ComponentLink10Description=https://datasheet.octopart.com:443/CL21B105KBFNNNE-Samsung-datasheet-59220082.pdf?src-supplier=TME, ComponentLink10URL=https://datasheet.octopart.com:443/CL21B105KBFNNNE-Samsung-datasheet-59220082.pdf?src-supplier=TME, Depth=1.25mm, Height=1.35mm, Length=2mm, Lifecycle Status=Production, Manufacturer Part Number=CL21B105KBFNNNE, Material=Ceramic, Mounting Technology="Surface Mount", Number of Terminals=2, Pricing="2000=0,00938, 4000=0,00922, 8000=0,00907, 16000=0,00892, 32000=0,00878 (USD)", Radiation Hardening=No, REACH SVHC=Yes, RoHS=Compliant, Schedule B="8532240020, 8532240020|8532240020, 8532240020|8532240020|8532240020, 8532240020|8532240020|8532240020|8532240020", Stock=488000, Supplier=Avnet, Supplier Part Number=CL21B105KBFNNNE, Thickness=1.3462mm, Voltage Rating=50V, Voltage Rating (DC)=50V, Width=1.25mm
C11: library part EEEFP1V470AP, "Radial Can - SMD ALUMINUM ELECTROLYTIC CAPACITOR FP 35V 47muF ±20% 0.248Dia 6.30mm", Case/Package=Radial, ESR (Equivalent Series Resistance)=260mΩ, Leakage Current=16.45µA, Manufacturer=Panasonic, Manufacturer Lifecycle Status=ACTIVE, Max Operating Temperature=105°C, Min Operating Temperature=-55°C, Ripple Current=300mA, Supplier Part Number=EEE-FP1V470AP, Tolerance=20%, Voltage=35V, Category="Aluminum Electrolytic Capacitors", China RoHS=Compliant, ComponentLink1Description=https://datasheet.octopart.com:443/EEEFP1V470AP-Panasonic-datasheet-182100943.pdf?src-supplier=IHS, ComponentLink1URL=https://datasheet.octopart.com:443/EEEFP1V470AP-Panasonic-datasheet-182100943.pdf?src-supplier=IHS, ComponentLink2Description=https://datasheet.octopart.com:443/EEEFP1V470AP-Panasonic-datasheet-66433925.pdf?src-supplier=Future+Electronics, ComponentLink2URL=https://datasheet.octopart.com:443/EEEFP1V470AP-Panasonic-datasheet-66433925.pdf?src-supplier=Future+Electronics, ComponentLink3Description=https://datasheet.octopart.com:443/EEEFP1V470AP-Panasonic-datasheet-10533123.pdf?src-supplier=Future+Electronics, ComponentLink3URL=https://datasheet.octopart.com:443/EEEFP1V470AP-Panasonic-datasheet-10533123.pdf?src-supplier=Future+Electronics, ComponentLink4Description=https://datasheet.octopart.com:443/EEEFP1V470AP-Panasonic-datasheet-8835375.pdf?src-supplier=Future+Electronics, ComponentLink4URL=https://datasheet.octopart.com:443/EEEFP1V470AP-Panasonic-datasheet-8835375.pdf?src-supplier=Future+Electronics, ComponentLink5Description=https://datasheet.octopart.com:443/EEEFP1V470AP-Panasonic-datasheet-5402830.pdf?src-supplier=Future+Electronics, ComponentLink5URL=https://datasheet.octopart.com:443/EEEFP1V470AP-Panasonic-datasheet-5402830.pdf?src-supplier=Future+Electronics, ComponentLink6Description=https://datasheet.octopart.com:443/EEEFP1V470AP-Panasonic-datasheet-13268972.pdf?src-supplier=Electro+Sonic, ComponentLink6URL=https://datasheet.octopart.com:443/EEEFP1V470AP-Panasonic-datasheet-13268972.pdf?src-supplier=Electro+Sonic, ComponentLink7Description=https://datasheet.octopart.com:443/EEE-FP1V470AP-Panasonic-datasheet-27908621.pdf?src-supplier=Electro+Sonic, ComponentLink7URL=https://datasheet.octopart.com:443/EEE-FP1V470AP-Panasonic-datasheet-27908621.pdf?src-supplier=Electro+Sonic, ComponentLink8Description=https://datasheet.octopart.com:443/EEEFP1V470AP-Panasonic-datasheet-43765692.pdf?src-supplier=Newark, ComponentLink8URL=https://datasheet.octopart.com:443/EEEFP1V470AP-Panasonic-datasheet-43765692.pdf?src-supplier=Newark, ComponentLink9Description=https://datasheet.octopart.com:443/EEE-FP1V470AP-Panasonic-datasheet-166810424.pdf?src-supplier=Newark, ComponentLink9URL=https://datasheet.octopart.com:443/EEE-FP1V470AP-Panasonic-datasheet-166810424.pdf?src-supplier=Newark, ComponentLink10Description=https://datasheet.octopart.com:443/EEE-FP1V470AP-Panasonic-datasheet-154766120.pdf?src-supplier=Master+Electronics, ComponentLink10URL=https://datasheet.octopart.com:443/EEE-FP1V470AP-Panasonic-datasheet-154766120.pdf?src-supplier=Master+Electronics, ComponentLink11Description=https://sigma.octopart.com:443/150570760/technical_drawing/Panasonic-EEEFP1V470AP.pdf?src-supplier=Panasonic+SCT, ComponentLink11URL=https://sigma.octopart.com:443/150570760/technical_drawing/Panasonic-EEEFP1V470AP.pdf?src-supplier=Panasonic+SCT, ComponentLink12Description=https://datasheet.octopart.com:443/EEEFP1V470AP-Panasonic-datasheet-5301681.pdf?src-supplier=Farnell, ComponentLink12URL=https://datasheet.octopart.com:443/EEEFP1V470AP-Panasonic-datasheet-5301681.pdf?src-supplier=Farnell, Contact Plating=Tin, Diameter=6.3mm, Dissipation Factor=12%, Height=5.8mm, Height - Seated (Max)=5.7912mm, Lead Free="Lead Free", Lead Pitch=1.8mm, Length=5.8mm, Life (Hours)=2000hours, Lifecycle Status=Production, Manufacturer Part Number=EEEFP1V470AP, Material=Aluminium, Mounting Technology="Surface Mount", Number of Terminals=2, Packaging="Cut Tape", Part Series="FP (High temp. reflow)", Pins=2, Pricing="1000=0,11738 (USD)", Radiation Hardening=No, REACH SVHC=Yes, Ripple Current (AC)=300mA, RoHS=Compliant, Schedule B="8532220020, 8532220020|8532220020|8532220020|8532220020|8532220020", Stock=175000, Supplier=Avnet, Termination=SMD/SMT, Voltage Rating=35V, Voltage Rating (DC)=35V, Width=6.6mm
P1: "Conector 2 pinos", Color=Natural, LCSC=C265283, Manufacturer=JST, Supplier Part Number=455-2946-ND, Category="Headers and Wire Housings", ComponentLink1Description=https://datasheet.octopart.com:443/B2B-XH-A-GU-JST-datasheet-12510042.pdf?src-supplier=IHS, ComponentLink1URL=https://datasheet.octopart.com:443/B2B-XH-A-GU-JST-datasheet-12510042.pdf?src-supplier=IHS, ComponentLink2Description=https://datasheet.octopart.com:443/B2B-XH-A-GU-JST-datasheet-140264791.pdf?src-supplier=LKR, ComponentLink2URL=https://datasheet.octopart.com:443/B2B-XH-A-GU-JST-datasheet-140264791.pdf?src-supplier=LKR, ComponentLink3Description=https://datasheet.octopart.com:443/B2B-XH-A-GU-JST-datasheet-8325564.pdf?src-supplier=Future+Electronics, ComponentLink3URL=https://datasheet.octopart.com:443/B2B-XH-A-GU-JST-datasheet-8325564.pdf?src-supplier=Future+Electronics, Connector Type="Male Pin", Contact Gender=Male, Contact Material=Brass, Contact Plating=Tin, Fastening Type=Detent, Lead Free="Lead Free", Lifecycle Status=Production, Manufacturer Part Number=B2B-XH-A-GU, Mounting Technology="Through Hole", Number of Positions=2, Number of Rows=1, Pins=2, Pitch=2.4892mm, Pricing="1=0,25, 10=0,212, 100=0,1804, 500=0,16102, 1000=0,15333, 5000=0,13685, 10000=0,13032 (USD)", RoHS=Non-Compliant, Stock=16934, Supplier=DigiKey, Terminal Pitch=2.5mm, Termination=Press-Fit
P2: library part 90131-0763, "Conector STLINK", Contact Resistance=20mΩ, Current Rating=3A, Housing Color=Black, Insulation Resistance=5GΩ, LCSC=C588698, Manufacturer=Molex, Manufacturer Lifecycle Status=ACTIVE, Max Operating Temperature=125°C, Min Operating Temperature=-55°C, Operating Force=973mN, Supplier Part Number=WM8139-ND, Voltage Rating=350V, Category="Headers and Wire Housings", China RoHS=Compliant, ComponentLink1Description=https://datasheet.octopart.com:443/90131-0763-Molex-datasheet-141422385.pdf?src-supplier=IHS, ComponentLink1URL=https://datasheet.octopart.com:443/90131-0763-Molex-datasheet-141422385.pdf?src-supplier=IHS, ComponentLink2Description=https://datasheet.octopart.com:443/90131-0763-Molex-datasheet-13786679.pdf?src-supplier=Sager+Electronics, ComponentLink2URL=https://datasheet.octopart.com:443/90131-0763-Molex-datasheet-13786679.pdf?src-supplier=Sager+Electronics, ComponentLink3Description=https://datasheet.octopart.com:443/0901310763-Molex-datasheet-158267589.pdf?src-supplier=Sager+Electronics, ComponentLink3URL=https://datasheet.octopart.com:443/0901310763-Molex-datasheet-158267589.pdf?src-supplier=Sager+Electronics, ComponentLink4Description=https://datasheet.octopart.com:443/90131-0763-Molex-datasheet-101584004.pdf?src-supplier=element14+APAC, ComponentLink4URL=https://datasheet.octopart.com:443/90131-0763-Molex-datasheet-101584004.pdf?src-supplier=element14+APAC, ComponentLink5Description=https://datasheet.octopart.com:443/90131-0763-Molex-datasheet-154760981.pdf?src-supplier=Master+Electronics, ComponentLink5URL=https://datasheet.octopart.com:443/90131-0763-Molex-datasheet-154760981.pdf?src-supplier=Master+Electronics, ComponentLink6Description=https://datasheet.octopart.com:443/90131-0763-Molex-datasheet-140189868.pdf?src-supplier=RS+(Formerly+Allied+Electronics), ComponentLink6URL=https://datasheet.octopart.com:443/90131-0763-Molex-datasheet-140189868.pdf?src-supplier=RS+(Formerly+Allied+Electronics), ComponentLink7Description=https://datasheet.octopart.com:443/90131-0763-Molex-datasheet-120158967.pdf?src-supplier=RS+(Formerly+Allied+Electronics), ComponentLink7URL=https://datasheet.octopart.com:443/90131-0763-Molex-datasheet-120158967.pdf?src-supplier=RS+(Formerly+Allied+Electronics), ComponentLink8Description=https://datasheet.octopart.com:443/90131-0763-Molex-datasheet-34442414.pdf?src-supplier=RS+(Formerly+Allied+Electronics), ComponentLink8URL=https://datasheet.octopart.com:443/90131-0763-Molex-datasheet-34442414.pdf?src-supplier=RS+(Formerly+Allied+Electronics), ComponentLink9Description=https://datasheet.octopart.com:443/90131-0763-Molex-datasheet-62106567.pdf?src-supplier=Electro+Sonic, ComponentLink9URL=https://datasheet.octopart.com:443/90131-0763-Molex-datasheet-62106567.pdf?src-supplier=Electro+Sonic, ComponentLink10Description=https://datasheet.octopart.com:443/90131-0763-Molex-datasheet-37173065.pdf?src-supplier=Electro+Sonic, ComponentLink10URL=https://datasheet.octopart.com:443/90131-0763-Molex-datasheet-37173065.pdf?src-supplier=Electro+Sonic, ComponentLink11Description=https://datasheet.octopart.com:443/90131-0763-Molex-datasheet-23711474.pdf?src-supplier=Electro+Sonic, ComponentLink11URL=https://datasheet.octopart.com:443/90131-0763-Molex-datasheet-23711474.pdf?src-supplier=Electro+Sonic, ComponentLink12Description=https://datasheet.octopart.com:443/90131-0763-Molex-datasheet-33004657.pdf?src-supplier=Newark, ComponentLink12URL=https://datasheet.octopart.com:443/90131-0763-Molex-datasheet-33004657.pdf?src-supplier=Newark, ComponentLink13Description=https://datasheet.octopart.com:443/90131-0763-Molex-datasheet-13548877.pdf?src-supplier=Farnell, ComponentLink13URL=https://datasheet.octopart.com:443/90131-0763-Molex-datasheet-13548877.pdf?src-supplier=Farnell, ComponentLink14Description=https://datasheet.octopart.com:443/90131-0763-Molex-datasheet-10978908.pdf?src-supplier=Farnell, ComponentLink14URL=https://datasheet.octopart.com:443/90131-0763-Molex-datasheet-10978908.pdf?src-supplier=Farnell, ComponentLink15Description=https://datasheet.octopart.com:443/90131-0763-Molex-datasheet-531206.pdf?src-supplier=Farnell, ComponentLink15URL=https://datasheet.octopart.com:443/90131-0763-Molex-datasheet-531206.pdf?src-supplier=Farnell, ComponentLink16Description=https://datasheet.octopart.com:443/90131-0763-Molex-datasheet-5392624.pdf?src-supplier=Verical, ComponentLink16URL=https://datasheet.octopart.com:443/90131-0763-Molex-datasheet-5392624.pdf?src-supplier=Verical, ComponentLink17Description=https://datasheet.octopart.com:443/90131-0763-Molex-datasheet-124887.pdf?src-supplier=DigiKey, ComponentLink17URL=https://datasheet.octopart.com:443/90131-0763-Molex-datasheet-124887.pdf?src-supplier=DigiKey, ComponentLink18Description=http://sigma.octopart.com:80/conflict_mineral_statement/Molex-company-72.pdf?src-supplier=Compliance+Statements, ComponentLink18URL=http://sigma.octopart.com:80/conflict_mineral_statement/Molex-company-72.pdf?src-supplier=Compliance+Statements, ComponentLink19Description=http://sigma.octopart.com:80/rohs_statement/Molex-company-73.pdf?src-supplier=Compliance+Statements, ComponentLink19URL=http://sigma.octopart.com:80/rohs_statement/Molex-company-73.pdf?src-supplier=Compliance+Statements, ComponentLink20Description=http://sigma.octopart.com:80/reach_statement/Molex-company-74.pdf?src-supplier=Compliance+Statements, ComponentLink20URL=http://sigma.octopart.com:80/reach_statement/Molex-company-74.pdf?src-supplier=Compliance+Statements, Contact Gender=Male, Contact Material="Gold, Nickel", Contact Plating=Gold, Country of Origin=SG, Gender=Male, Height=9.65mm, Housing Material=Polyester, Lead Free="Lead Free", Lead Pitch=2.54mm, Lifecycle Status=Production, Manufacturer Part Number=90131-0763, Material="Glass, Polyester", Mounting Technology="Through Hole", Number of Circuits=6, Number of Contacts=6, Number of Poles=6, Number of Positions=6, Number of Rows=2, Orientation=Vertical, Pins=6, Pitch=2.54mm, Plating=Tin, Plating Thickness=381nm, Pricing="1=1,65, 10=1,4, 100=1,1895, 800=1,0271, 1600=0,97808, 5600=0,89539, 10400=0,85718 (USD)", Radiation Hardening=No, REACH SVHC=Yes, RoHS=Compliant, Row Spacing=2.54mm, Schedule B="8536694040, 8536694040|8536694040|8536694040|8536694040|8536694040|8536694040|8536694040|8536694040|8536694040|8536694040|8536694040|8536694040|8536694040|8536694040|8536694040|8536694040|8536694040|8536694040|8536694040|8536694040|8536694040|8536694040|8536694040|85", Stock=9119, Supplier=DigiKey, Terminal Pitch=2.54mm, Termination="Through Hole", Voltage Rating (AC)=350V, Voltage Rating (DC)=350V, Working Voltage=350V
Q1 Q2 Q3: "Transistor: N-MOSFET; unipolar; 12V; 4.3A; 0.05ohm; 1.3W; -55+150 deg.C; SMD; SOT23", Case/Package=SOT-23, Continuous Drain Current (ID)=4.2A, Drain to Source Breakdown Voltage=20V, Drain to Source Resistance=45mΩ, Gate to Source Voltage (Vgs)=12V, Input Capacitance=740pF, LCSC=C2589, Manufacturer=Infineon, Manufacturer Package Identifier=Micro3™, Max Junction Temperature (Tj)=150°C, Max Power Dissipation=1.25W, Min Operating Temperature=-55°C, Package Quantity=3000, Supplier Part Number=IRLML2502TRPBFCT-ND, Threshold Voltage=1.2V, Category=MOSFETs, ComponentLink1Description=https://datasheet.octopart.com:443/IRLML2502TRPBF-Infineon-datasheet-34171437.pdf?src-supplier=IHS, ComponentLink1URL=https://datasheet.octopart.com:443/IRLML2502TRPBF-Infineon-datasheet-34171437.pdf?src-supplier=IHS, ComponentLink2Description=https://datasheet.octopart.com:443/IRLML2502-International-Rectifier-datasheet-180124963.pdf?src-supplier=IHS, ComponentLink2URL=https://datasheet.octopart.com:443/IRLML2502-International-Rectifier-datasheet-180124963.pdf?src-supplier=IHS, ComponentLink3Description=https://datasheet.octopart.com:443/IRLML2502TRPBF-Infineon-datasheet-180073321.pdf?src-supplier=Newark, ComponentLink3URL=https://datasheet.octopart.com:443/IRLML2502TRPBF-Infineon-datasheet-180073321.pdf?src-supplier=Newark, ComponentLink4Description=https://datasheet.octopart.com:443/IRLML2502TRPBF-International-Rectifier-datasheet-28942.pdf?src-supplier=element14+APAC, ComponentLink4URL=https://datasheet.octopart.com:443/IRLML2502TRPBF-International-Rectifier-datasheet-28942.pdf?src-supplier=element14+APAC, ComponentLink5Description=https://datasheet.octopart.com:443/IRLML2502TRPBF-Infineon-datasheet-10898080.pdf?src-supplier=element14+APAC, ComponentLink5URL=https://datasheet.octopart.com:443/IRLML2502TRPBF-Infineon-datasheet-10898080.pdf?src-supplier=element14+APAC, ComponentLink6Description=https://datasheet.octopart.com:443/IRLML2502TRPBF-Infineon-datasheet-7576328.pdf?src-supplier=element14+APAC, ComponentLink6URL=https://datasheet.octopart.com:443/IRLML2502TRPBF-Infineon-datasheet-7576328.pdf?src-supplier=element14+APAC, ComponentLink7Description=https://datasheet.octopart.com:443/IRLML2502TRPBF-International-Rectifier-datasheet-14058069.pdf?src-supplier=iiiC, ComponentLink7URL=https://datasheet.octopart.com:443/IRLML2502TRPBF-International-Rectifier-datasheet-14058069.pdf?src-supplier=iiiC, ComponentLink8Description=https://datasheet.octopart.com:443/IRLML2502-International-Rectifier-datasheet-10851050.pdf?src-supplier=iiiC, ComponentLink8URL=https://datasheet.octopart.com:443/IRLML2502-International-Rectifier-datasheet-10851050.pdf?src-supplier=iiiC, ComponentLink9Description=https://datasheet.octopart.com:443/IRLML2502TRPBF-Infineon-datasheet-9906866.pdf?src-supplier=RS+(Formerly+Allied+Electronics), ComponentLink9URL=https://datasheet.octopart.com:443/IRLML2502TRPBF-Infineon-datasheet-9906866.pdf?src-supplier=RS+(Formerly+Allied+Electronics), ComponentLink10Description=https://datasheet.octopart.com:443/IRLML2502TRPBF-International-Rectifier-datasheet-10470232.pdf?src-supplier=TME, ComponentLink10URL=https://datasheet.octopart.com:443/IRLML2502TRPBF-International-Rectifier-datasheet-10470232.pdf?src-supplier=TME, ComponentLink11Description=https://datasheet.octopart.com:443/IRLML2502TRPBF-International-Rectifier-datasheet-8360198.pdf?src-supplier=Jameco, ComponentLink11URL=https://datasheet.octopart.com:443/IRLML2502TRPBF-International-Rectifier-datasheet-8360198.pdf?src-supplier=Jameco, ComponentLink12Description=https://datasheet.octopart.com:443/IRLML2502TRPBF-International-Rectifier-datasheet-63679.pdf?src-supplier=Farnell, ComponentLink12URL=https://datasheet.octopart.com:443/IRLML2502TRPBF-International-Rectifier-datasheet-63679.pdf?src-supplier=Farnell, ComponentLink13Description=https://datasheet.octopart.com:443/IRLML2502TRPBF-International-Rectifier-datasheet-89315.pdf?src-supplier=DigiKey, ComponentLink13URL=https://datasheet.octopart.com:443/IRLML2502TRPBF-International-Rectifier-datasheet-89315.pdf?src-supplier=DigiKey, ComponentLink14Description=http://sigma.octopart.com:80/conflict_mineral_statement/Infineon-company-51.pdf?src-supplier=Compliance+Statements, ComponentLink14URL=http://sigma.octopart.com:80/conflict_mineral_statement/Infineon-company-51.pdf?src-supplier=Compliance+Statements, ComponentLink15Description=http://sigma.octopart.com:80/rohs_statement/International-Rectifier-company-54.pdf?src-supplier=Compliance+Statements, ComponentLink15URL=http://sigma.octopart.com:80/rohs_statement/International-Rectifier-company-54.pdf?src-supplier=Compliance+Statements, ComponentLink16Description=http://sigma.octopart.com:80/reach_statement/International-Rectifier-company-55.pdf?src-supplier=Compliance+Statements, ComponentLink16URL=http://sigma.octopart.com:80/reach_statement/International-Rectifier-company-55.pdf?src-supplier=Compliance+Statements, Contact Plating=Tin, Current Rating=4.2A, Drain to Source Voltage (Vdss)=20V, Dual Supply Voltage=20V, Element Configuration=Single, Fall Time=26ns, Height=1.016mm, Lead Free="Lead Free", Length=2.794mm, Lifecycle Status=NRND, Manufacturer Part Number=IRLML2502TRPBF, Max Operating Temperature=150°C, Min Breakdown Voltage=20V, Mounting Technology="Surface Mount", Nominal Vgs=1.2V, Number of Elements=1, Number of Terminals=3, On-State Resistance=45mΩ, Packaging="Tape & Reel", Pins=3, Power Dissipation=1.25W, Pricing="1=0,52, 10=0,323, 100=0,2053, 500=0,15428, 1000=0,13782 (USD)", Radiation Hardening=No, Rds On Max=45mΩ, REACH SVHC=Yes, Rise Time=10ns, RoHS=Compliant, Schedule B="8541290080, 8541290080|8541290080|8541290080|8541290080|8541290080", Stock=39178, Supplier=DigiKey, Termination=SMD/SMT, Turn-Off Delay Time=54ns, Turn-On Delay Time=7.5ns, Voltage Rating (DC)=20V